# Altium PCB OK1050-C_V1.2.PcbDoc (part 2 of 3)
Units mm, origin at the board's own origin, x right, y up, seen from the top; angles counter-clockwise.
Board outline 103.88 x 80.73 mm, 2 copper layers (Component Side, Bottom Layer), stack 0.325 mm thick; 231 components, 276 nets, 1026 pads, 717 vias.
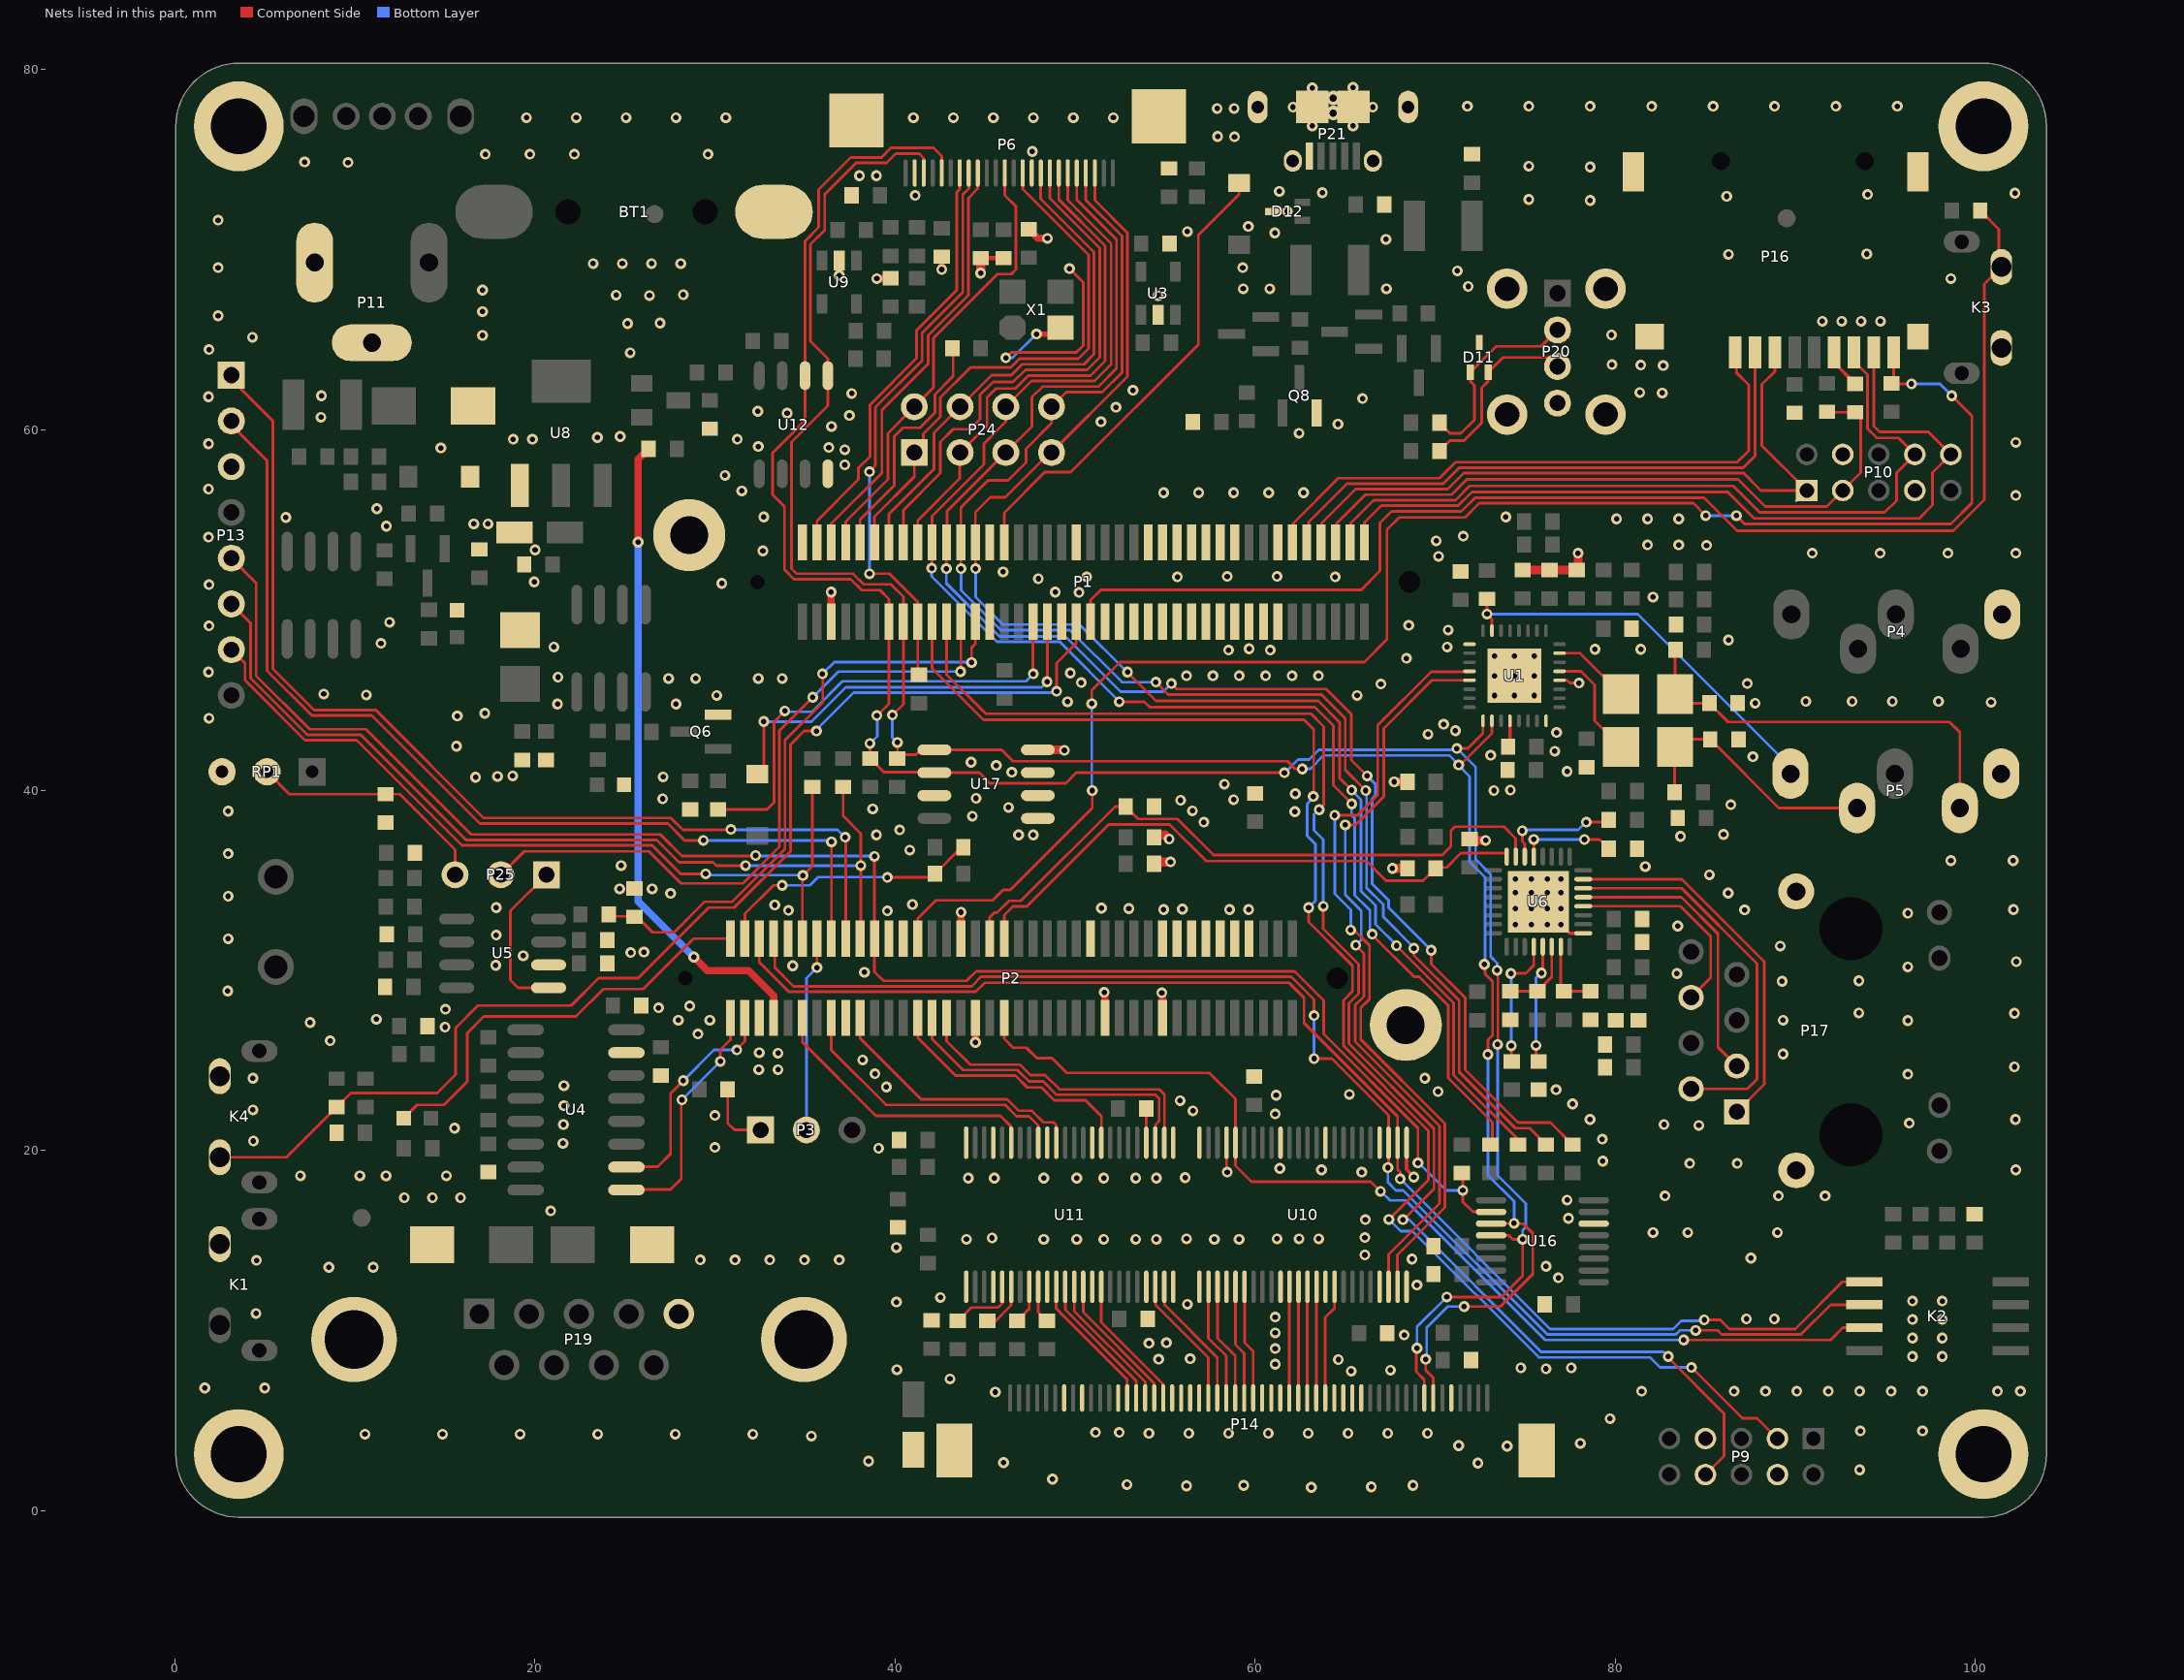
[diagram p2: the nets of this part, all layers, seen from the top]

## Via types
v1: diameter 0.6, hole 0.3, Component Side to Bottom Layer, tented both sides, 667 vias
v2: diameter 0.8, hole 0.4, Component Side to Bottom Layer, tented both sides, 20 vias
v3: diameter 0.66, hole 0.3, Component Side to Bottom Layer, tented both sides, 16 vias
v4: diameter 0.5, hole 0.3, Component Side to Bottom Layer, tented both sides, 9 vias
v5: diameter 1, hole 0.4, Component Side to Bottom Layer, tented both sides, 5 vias

## Nets (pads, with @x,y where several pads share a name; then routed paths per layer and width w, separated by ;. In a path a pad name is that pad's centre, name@x,y a point inside that pad or via, vN(x,y) a via of type N, cw(c..) or ccw(c..) an arc to the next point about the centre after c; other vN are vias at no path point) (continued)
D9_LCDIF_DATA06/BT_CFG_6: K2.3 P2.42 U10.20 | length 58.3
  Component Side w0.152: P2.42@46.061,27.361 46.061,26.202 46.558,25.705 47.295,25.705 47.881,25.118 48.72,25.118 49.534,24.304 57.459,24.304 58.896,22.866 U10.20@58.896,20.371 ; U10.20@58.905,20.429 58.905,19.149 59.792,18.263 66.421,18.263 v1(66.954,17.729) ; v1(83.795,9.474) 91.948,9.474 92.634,10.16 K2.3@93.828,10.16
  Bottom Layer w0.152: v1@67.005,17.704 67.488,17.221 68.351,17.221 76.098,9.474 v1(83.795,9.474)
D10_LCDIF_DATA09: P2.50 U11.2 | length 17.3
  Component Side w0.152: P2.50@42.861,27.361 42.861,26.074 44.171,24.765 46.935,24.765 47.52,24.181 48.336,24.181 49.125,23.392 54.662,23.392 54.966,23.089 U11.2@54.966,20.396
D11_LCDIF_DATA15: P2.62 U11.14 | length 15
  Component Side w0.152: P2.62@38.061,27.361 38.061,26.226 41.453,22.835 46.23,22.835 46.865,22.2 47.6,22.2 48.242,21.557 48.801,21.557 48.946,21.412 U11.14@48.946,20.422
D12_ENET_RX_D1: P2.43 R55.2 U6.15 | length 36.5
  Component Side w0.152: P2.43@45.261,31.761 45.261,32.942 45.517,33.198 45.669,33.198 46.33,33.858 46.99,33.858 52.222,39.091 R55.2@52.807,39.091 53.493,38.404 55.678,38.404 57.683,36.398 70.385,36.398 70.866,36.879 70.866,37.744 71.095,37.973 73.812,37.973 74.467,37.318 U6.15@74.467,36.307
D13_SD1_CD: P2.53 P16.11 R22.1 | length 89.2
  Component Side w0.152: P2.53@41.261,31.761 41.261,32.879 42.266,33.884 45.415,33.884 45.999,34.468 46.406,34.468 50.952,39.014 v1(50.952,39.98) ; v1(50.927,44.806) 50.927,45.542 52.502,47.117 66.065,47.117 67.31,48.362 67.31,54.458 67.996,55.143 71.653,55.143 72.441,55.931 84.328,55.931 v1(85.014,55.245) ; v1(86.716,55.245) 87.173,54.788 98.628,54.788 99.797,55.956 99.797,60.782 v1(98.679,61.9) ; R22.1@95.123,62.586 R22.1@95.326,62.586 95.352,62.56 v1(96.444,62.56) ; R22.1@95.45,62.913 P16.11@95.45,64.309
  Bottom Layer w0.152: v1(50.927,44.806) 50.927,40.005 v1(50.952,39.98) ; v1(85.014,55.245) v1(86.716,55.245) ; v1(96.444,62.56) 98.019,62.56 v1(98.679,61.9)
D14_WDOG1_B: P2.55
D_N: D11.1 P20.2 R93.1 | length 11
  Component Side w0.152: R93.1@70.231,60.401 70.815,59.817 71.425,59.817 72.166,60.558 72.166,62.022 72.166,62.482 71.941,62.707 D11.1@71.941,63.208 73.381,64.648 75.875,64.648 P20.2@76.784,65.557
D_P: D11.2 P20.3 R94.1 | length 10.4
  Component Side w0.152: R94.1@70.231,58.826 70.815,59.411 71.593,59.411 72.572,60.39 72.572,61.854 72.572,62.339 72.941,62.707 D11.2@72.941,63.208 73.762,64.029 76.28,64.029 P20.3@76.784,63.525
E1_SEMC_CS0: P2.19
E3_SEMC_D0: P1.20
E4_SEMC_D15: P1.16
E5_SEMC_D13: P1.14
E7_LCDIF_ENABLE: P2.70 U11.19 | length 15.8
  Component Side w0.152: P2.70@34.861,27.361 34.861,25.997 38.936,21.923 45.852,21.923 46.431,21.344 U11.19@46.431,20.422
E8_LCDIF_HSYNC: P2.66 U11.16 | length 16
  Component Side w0.152: P2.66@36.461,27.361 36.461,25.566 39.496,22.531 46.104,22.531 46.739,21.896 47.445,21.896 47.955,21.385 U11.16@47.955,20.422
E10_LCDIF_DATA10: P2.52 U11.3 | length 17.7
  Component Side w0.152: P2.52@42.061,27.361 42.061,26.189 43.79,24.46 46.81,24.46 47.445,23.825 48.235,23.825 48.972,23.088 54.458,23.088 54.661,22.885 54.661,21.615 54.458,21.412 U11.3@54.458,20.396
E11_LCDIF_DATA11: P2.54 U11.9 | length 14.6
  Component Side w0.152: P2.54@41.261,27.361 41.261,26.252 43.358,24.155 46.685,24.155 47.346,23.495 48.133,23.495 48.844,22.784 50.571,22.784 51.46,21.895 U11.9@51.46,20.422
E12_ENET_RX_D0: P2.41 R74.1 U6.16 | length 33.2
  Component Side w0.152: P2.41@46.061,31.761 46.061,33.056 46.558,33.553 47.32,33.553 51.867,38.1 55.245,38.1 57.277,36.068 66.167,36.068 67.259,34.976 69.317,34.976 70.053,35.712 70.637,35.712 71.425,36.5 U6.16@73.939,36.5
E14_JTAG_TMS/SWD_DIO: P2.63 P13.1 | length 58.4
  Component Side w0.152: P13.1@3.073,62.89 5.461,60.503 5.461,46.734 7.745,44.45 11.176,44.45 17.171,38.455 27.56,38.455 28.219,37.795 v1@30.886,37.795 ; v1(37.236,37.389) 37.261,37.364 P2.63@37.261,31.761
  Bottom Layer w0.152: v1@30.886,37.795 36.805,37.795 v1@37.211,37.389
  other v1: 30.886,37.821
ENET_CONFIG0: R63.2 U6.28 | length 7.4
  Component Side w0.152: v1(74.219,25.806) R63.2@74.244,24.943 ; v1@74.244,29.896 74.441,29.896 74.499,29.838 75.025,29.838 75.467,30.281 U6.28@75.467,31.307
  Bottom Layer w0.152: v1@74.219,29.794 v1(74.219,25.806) v1@74.244,25.908
  other v1: 74.193,29.82
ENET_CONFIG1: R76.2 U6.29 | length 6.7
  Component Side w0.152: v1@75.59,26.06 v1(75.59,25.832) 75.59,25.095 R76.2@75.743,24.943 ; v1@75.895,29.896 75.967,29.968 U6.29@75.967,31.307
  Bottom Layer w0.152: v1(75.59,25.832) 75.59,29.591 v1@75.844,29.845
  other v1: 75.895,29.845
ENET_PHYAD0: R69.1 U6.13 | length 5.3
  Component Side w0.152: U6.13@75.467,36.307 v1(75.467,37.266) ; v1(78.283,37.262) 79.121,37.262 R69.1@79.629,36.754
  Bottom Layer w0.152: v1(75.467,37.266) v1@78.283,37.266
ENET_PHYAD1: R6.2 U6.14 | length 6.6
  Component Side w0.152: v1(74.828,37.744) 74.828,37.16 74.967,37.021 U6.14@74.967,36.307 ; v1(78.384,38.227) 79.578,38.227 R6.2@79.629,38.278
  Bottom Layer w0.152: v1(74.828,37.744) 74.878,37.794 77.926,37.794 78.384,38.252 v1(78.384,38.227)
ETH1_RX_N: P17.6 U6.4 | length 11.6
  Component Side w0.152: U6.4@78.217,33.557 83.613,33.557 85.293,31.877 85.293,29.584 P17.6@84.203,28.494
ETH1_RX_P: P17.3 U6.5 | length 16.1
  Component Side w0.152: U6.5@78.217,34.057 83.672,34.057 85.7,32.029 85.7,25.728 P17.3@86.743,24.684
ETH1_TX_N: P17.2 U6.6 | length 21.7
  Component Side w0.152: U6.6@78.217,34.557 83.68,34.557 87.859,30.378 87.859,23.953 87.321,23.414 P17.2@84.203,23.414
ETH1_TX_P: P17.1 U6.7 | length 20.9
  Component Side w0.152: U6.7@78.181,35.052 83.693,35.052 88.265,30.48 88.265,23.666 P17.1@86.743,22.144
F1_SEMC_BA1: P2.17
F2_SEMC_D4: P1.24
F3_SEMC_D1: P1.26
F4_SEMC_D2: P1.22
F11_BOOT_MODE0: K2.2 P2.73 U10.3 | length 76
  Component Side w0.152: P2.73@33.261,31.761 33.325,31.697 33.325,30.15 34.359,29.115 44.254,29.115 44.78,29.642 62.001,29.642 63.271,28.372 v1(63.271,27.483) ; v1(63.271,25.095) 64.264,25.095 67.405,21.954 U10.3@67.405,20.429 v1@67.405,19.04 ; v1(84.455,10.008) 85.674,10.008 85.904,9.778 90.296,9.778 91.948,11.43 K2.2@93.828,11.43
  Bottom Layer w0.152: v1@63.271,25.146 v1(63.271,27.483) ; v1(67.371,19.04) 67.371,18.227 67.818,17.78 68.223,17.78 76.224,9.779 83.353,9.779 83.581,10.008 v1(84.455,10.008)
F11_SAI1_TX_SYNC: U1.13 U10.46 | length 42.1
  Component Side w0.152: v1(64.999,38.075) 65.566,38.075 67.132,39.641 67.132,43.434 69.803,46.105 U1.13@71.897,46.105 ; v1(65.583,31.394) 66.04,30.937 66.04,28.55 65.557,28.067 65.557,26.035 70.232,21.361 70.232,17.044 67.405,14.218 U10.46@67.405,12.429
  Bottom Layer w0.152: v1(64.999,38.075) 64.999,34.188 65.888,33.299 65.888,31.699 v1(65.583,31.394)
F12_JTAG_TCKS/WD_CLK: P2.65 P13.2 | length 55.3
  Component Side w0.152: P13.2@3.073,60.35 5.131,58.293 5.131,46.634 7.62,44.145 10.947,44.145 16.942,38.151 27.381,38.151 28.321,37.211 v1(29.362,37.211) ; P2.65@36.461,31.761 36.474,31.774 v1(36.474,37.135)
  Bottom Layer w0.152: v1(29.362,37.211) 36.449,37.211 36.474,37.186 v1(36.474,37.135)
F13_SAL1_RXD: P2.67 P3.2 | length 10.9
  Component Side w0.152: v1(35.661,30.15) P2.67@35.661,31.761
  Bottom Layer w0.152: P3.2@35.077,21.133 35.077,29.566 v1(35.661,30.15)
F14_SAL1_TXD: P2.61 P13.6 R35.2 | length 51.6
  Component Side w0.152: P13.6@3.15,50.343 4.218,49.274 4.218,46.226 7.365,43.079 10.337,43.079 16.181,37.236 26.772,37.236 28.016,35.992 29.896,35.992 30.074,35.814 v1(31.699,35.814) ; R35.2@37.114,40.183 37.114,38.578 38.1,37.592 v1(38.1,35.814) 38.1,31.851 38.125,31.825 P2.61@38.061,31.761
  Bottom Layer w0.152: v1(31.699,35.814) v1(38.1,35.814)
G1_SEMC_A1: P2.9
G2_SEMC_A10: P2.11
G3_SEMC_A2: P2.7
G4_SEMC_D3: P1.28
G5_SEMC_D5: P1.30
G10_JTAG_NTRST: P2.59 P13.5 R41.1 U16.10 | length 95.8
  Component Side w0.152: P13.5@3.15,52.883 4.522,51.51 4.522,46.354 7.493,43.383 10.617,43.383 16.459,37.541 26.975,37.541 28.169,36.347 v1@32.258,36.347 ; v1(38.861,36.322) P2.59@38.861,31.761 38.861,29.922 39.364,29.419 43.974,29.419 44.501,29.947 62.179,29.947 63.805,28.321 63.805,26.467 69.037,21.234 v1(69.037,19.304) ; R41.1@71.526,18.72 v1(71.526,17.78) 71.526,17.145 72.086,16.586 U16.10@73.096,16.586 U16.10@73.325,16.586
  Bottom Layer w0.152: v1@32.258,36.347 v1@38.76,36.347 ; v1@69.088,19.253 69.113,19.279 70.612,17.78 v1(71.526,17.78)
  other v1: 32.258,36.373
G11_ENET_NRST: P2.77 R2.2 R59.2 | length 15.7
  Component Side w0.152: P2.77@31.661,31.761 31.661,33.134 33.249,34.722 v1(33.731,34.722) ; v1(39.573,35.154) 41.961,35.154 R2.2@42.215,35.408 ; R2.2@42.215,35.357 43.688,36.83 R59.2@43.79,36.83 ; R59.2@43.688,36.551 R59.2@43.79,36.551
  Bottom Layer w0.152: v1(33.731,34.722) 35.281,34.722 35.738,35.179 39.827,35.179 39.802,35.154 v1(39.573,35.154)
G12_CSI_D3/ROW0: P1.57 P6.21 P24.8 R107.1 | length 82.6
  Component Side w0.152: v1@43.661,52.3 43.661,55.701 45.161,57.201 46.279,57.201 47.269,58.191 47.269,58.953 48.692,60.376 P24.8@48.692,61.29 49.505,62.103 51.511,62.103 52.604,63.196 52.604,70.764 50.593,72.774 P6.21@50.593,74.269 ; v1(54.483,45.999) 55.169,45.314 63.678,45.314 64.999,43.993 64.999,41.123 v1(66.142,39.98) ; v1(68.809,31.217) 68.809,30.834 71.323,28.319 71.323,24.359 74.447,21.234 75.235,21.234 R107.1@76.149,20.32
  Bottom Layer w0.152: v1(43.663,52.299) 43.663,51.101 45.869,48.895 49.708,48.895 52.603,45.999 v1(54.483,45.999) ; v1(66.142,39.98) 66.186,39.935 66.186,34.576 67.107,33.655 67.107,32.969 v1@68.834,31.242
G13_SAL1_MCLK: P2.69 P13.7 R36.2 | length 46.2
  Component Side w0.152: P13.7@3.15,47.803 3.912,47.041 3.912,46.101 7.237,42.775 10.108,42.775 15.951,36.932 26.518,36.932 28.105,35.344 v1@29.477,35.344 ; P2.69@34.861,31.761 34.861,35.235 v1(34.887,35.261) 35.408,35.782 R36.2@35.408,40.183 R36.2@35.611,40.183
  Bottom Layer w0.152: v1(29.489,35.357) 29.56,35.286 v1@34.778,35.286
G14_BOOT_MODE1: K2.1 P2.75 U10.2 | length 75.7
  Component Side w0.152: P2.75@32.461,31.761 32.461,30.455 34.104,28.811 44.483,28.811 44.983,29.312 61.874,29.312 62.713,28.473 62.713,27.076 67.905,21.884 U10.2@67.905,20.429 67.905,18.937 68.047,18.796 v1(68.047,18.415) ; v1(84.938,10.592) 85.827,10.592 86.336,10.082 89.991,10.082 92.608,12.7 K2.1@93.828,12.7
  Bottom Layer w0.152: v1(68.047,18.415) 76.378,10.084 83.21,10.084 83.663,10.536 v1@84.882,10.536
G14_SAL1_TX_BCLK: U1.12 U10.47 | length 43.4
  Component Side w0.152: v1@64.313,38.608 v1(64.414,38.608) 65.669,38.608 66.802,39.741 66.802,43.612 69.769,46.579 U1.12@71.897,46.579 ; v1(65.303,32.233) 65.491,32.233 66.345,31.379 66.345,28.397 65.862,27.915 65.862,26.162 70.536,21.488 70.536,16.84 67.894,14.199 U10.47@67.894,12.471
  Bottom Layer w0.152: v1(64.414,38.608) 64.414,34.239 65.303,33.35 v1(65.303,32.233)
GND: BT1.2 C1.1 C2.1 C3.1 C4.1 C5.1 C11.1 C12.1 C16.2 C17.2 C18.2 C19.2 C20.2 C21.2 C22.1 C24.1 C25.1 C26.1 C28.1 C29.1 C30.2 C31.2 C32.2 C33.2 C34.2 C35.2 C36.1 C37.1 C38.2 C39.2 C40.2 C41.2 C42.2 C43.2 C44.2 C45.1 C47.1 C48.1 C49.2 C52.1 C56.2 C57.2 C59.2 C60.1 C61.1 C62.2 C64.1 C65.1 C66.1 C67.1 C68.1 D1.2 D2.2 D9.1 D10.1 D11.3 D12.3 K1.1 K3.1 K4.1 LED3.2 LED4.2 M1.1 M2.1 M3.1 M4.1 M5.1 M6.1 P1.13 P1.18 P1.27 P1.38 P1.41 P1.53 P1.54 P1.76 P1.79 P2.15 P2.20 P2.28 P2.29 P2.46 P2.47 P2.57 P2.64 P2.71 P2.76 P4.1 P5.1 P6.2 P6.15 P6.25 P6.26 P9.4 P9.7 P10.4 P10.7 P11.2 P11.3 P13.3 P14.5 P14.15 P14.16 P14.17 P14.18 P14.24 P14.25 P14.26 P14.33 P14.34 P14.35 P14.36 P14.42 P14.46 P14.48 P14.55 P14.56 P16.3 P16.6 P16.12 P16.13 P17.13 P17.14 P19.5 P19.10 P19.11 P20.4 P20.5 P20.6 P20.7 P20.8 P21.5 P21.6 P21.7 P21.8 P21.9 P21.10 Q6.2 Q8.2 R4.2 R7.2 R8.2 R13.2 R15.2 R17.1 R20.2 R24.2 R27.1 R34.1 R37.1 R38.1 R46.1 R52.2 R55.1 R60.1 R61.1 R64.2 R69.2 R72.1 R74.2 R76.1 R89.1 R90.1 R96.1 RP1.3 U1.9 U1.20 U1.24 U1.28 U1.33 U3.2 U4.15 U5.2 U6.1 U6.33 U8.3 U9.2 U10.1 U10.4 U10.10 U10.15 U10.21 U10.24 U10.25 U10.28 U10.34 U10.39 U10.45 U10.48 U11.1 U11.4 U11.10 U11.15 U11.21 U11.24 U11.25 U11.28 U11.34 U11.39 U11.45 U11.48 U12.4 U16.6 U17.1 U17.2 U17.3 U17.4 U17.7 X1.2 | length 49.1
  Component Side w0.152: v1(46.152,64.008) 46.457,64.313 50.063,64.313 50.446,64.695 50.446,68.197 v1(49.682,68.961) ; U11.4@53.95,20.431 C67.1@53.95,22.327 ; U10.21@58.405,20.429 58.405,18.912 v1@58.522,18.796 ; D12.3@60.973,72.136 v1@61.772,72.136 ; U1.28@76.897,46.105 77.314,46.105 77.47,45.949 v1(77.978,45.949)
  Component Side w0.2: v1(43.663,33.223) v1@43.663,33.376 ; U10.1@68.405,20.429 68.405,18.951 v1@68.824,18.532 ; C1.1@74.147,42.524 U1.20@74.147,43.855 ; U6.33@75.717,33.807 v3(76.987,32.537) 77.465,32.059 78.217,32.059 U6.1@78.217,32.057 ; P16.6@92.15,64.309 92.15,63.729 C39.2@93.319,62.56
  Component Side w0.254: C20.2@44.755,69.545 C21.2@46.025,69.545
  Component Side w0.3: v1(47.854,65.329) X1.2@48.655,65.329
  Component Side w0.4: v1(36.449,51.003) 36.449,49.373 P1.76@36.461,49.361 ; v1@36.906,68.656 U9.2@36.906,69.399 ; v1(38.989,68.402) 39.726,68.402 C11.1@39.751,68.428 ; C18.2@42.596,69.621 42.596,68.936 v1@42.621,68.91 ; P2.47@43.661,31.761 43.661,33.222 v1(43.663,33.223) ; v1(44.461,25.998) P2.46@44.461,27.361 ; C68.1@47.422,71.145 47.93,70.637 v1(48.463,70.637) ; P2.28@51.661,27.361 v1@51.661,28.73 ; P2.20@54.861,27.361 v1@54.861,28.705
  Component Side w0.5: v1(44.755,68.707) C20.2@44.755,69.545 ; U17.4@47.93,42.242 v1@49.43,42.242 ; R72.1@54.381,36.017 v1(55.296,36.017) ; R34.1@54.407,37.516 54.991,37.516 v1(55.22,37.287) ; v1(67.615,35.662) R74.2@68.453,35.662 ; v1(67.716,40.462) R64.2@68.453,40.462 ; C40.2@71.984,37.211 v1(72.796,37.211) ; R8.2@74.854,52.222 R4.2@77.851,52.222 ; R4.2@77.927,52.299 v1(77.927,53.162)
  Bottom Layer w0.152: v1(46.152,64.008) 46.533,64.008 v1(47.854,65.329)
  other v1: 63.119,1.295 66.446,1.321 56.185,1.372 59.36,1.397 68.758,1.397 52.883,1.448 48.743,1.753 93.565,2.261 72.365,2.642 46.025,2.667 38.532,2.743 73.99,3.581 71.298,3.607 78.054,3.734 35.357,4.14 10.566,4.242 14.874,4.242 19.182,4.242 23.49,4.242 27.798,4.242 32.106,4.242 54.102,4.293 56.312,4.293 58.522,4.293 60.731,4.293 62.941,4.293 65.151,4.293 67.361,4.293 69.571,4.293 51.13,4.343 52.451,4.343 93.599,4.42 97.053,4.42 79.705,5.105 45.568,6.579 81.458,6.629 86.589,6.629 88.333,6.629 90.077,6.629 91.821,6.629 93.565,6.629 95.309,6.629 97.053,6.629 101.219,6.629 102.489,6.629 1.676,6.807 5.004,6.807 43.053,7.315 65.329,7.747 67.513,7.798 40.107,7.823 76.149,7.874 74.752,7.925 77.546,7.925 61.112,8.128 64.618,8.382 54.635,8.407 56.388,8.433 96.495,8.56 98.146,8.56 61.112,9 54.102,9.296 55.067,9.322 96.495,9.584 98.146,9.584 68.275,9.754 61.112,9.872 96.495,10.609 98.146,10.609 87.274,10.643 88.824,10.643 61.112,10.744 4.521,10.947 56.236,11.455 40.081,11.582 96.495,11.633 98.146,11.633 42.52,11.836 68.986,12.522 76.835,12.929 8.56,13.513 11.024,13.513 76.149,13.564 4.547,13.894 29.185,13.919 31.115,13.919 33.045,13.919 34.976,13.919 36.906,13.919 68.707,13.97 87.528,14.021 66.091,14.199 40.081,14.605 43.967,15.062 48.26,15.062 50.089,15.062 51.587,15.062 53.365,15.062 54.508,15.062 57.734,15.062 59.106,15.062 56.185,15.088 61.214,15.088 62.433,15.088 63.525,15.088 45.39,15.138 66.091,15.164 82.093,15.443 84.023,15.443 89.002,15.443 66.116,16.154 77.394,16.231 20.879,16.637 77.318,17.247 12.751,17.374 14.313,17.374 15.875,17.374 82.753,17.475 89.052,17.475 91.643,17.475 44.069,18.466 45.517,18.466 48.26,18.466 50.089,18.466 51.587,18.466 53.365,18.466 54.508,18.466 56.109,18.491 68.809,18.517 6.985,18.593 10.287,18.593 11.735,18.593 15.088,18.593 58.445,18.796 65.913,18.796 63.678,18.923 102.235,18.923 61.366,18.999 84.125,19.279 86.766,19.279 79.299,19.406 39.091,20.117 29.997,20.168 21.565,20.396 4.369,20.523 79.273,20.625 15.545,21.234 84.633,21.387 21.59,21.438 82.702,21.438 96.317,21.514 78.588,21.717 102.21,21.717 29.997,21.946 61.112,22.022 56.54,22.2 4.343,22.25 21.615,22.479 77.622,22.581 55.829,22.758 61.163,23.063 65.227,23.114 70.155,23.266 76.708,23.368 39.522,23.52 21.615,23.597 4.343,24.003 69.418,24.003 96.241,24.232 38.887,24.257 32.436,24.486 33.503,24.486 102.159,24.638 38.202,25.019 89.306,25.349 33.503,25.4 32.461,25.425 8.636,26.086 29.058,26.467 15.011,26.848 7.518,27.102 27.965,27.229 29.718,27.229 89.306,27.229 96.241,27.212 11.201,27.28 102.159,27.61 93.523,27.635 15.037,27.838 26.873,27.915 28.6,28.016 54.813,28.753 51.613,28.778 2.946,28.854 89.256,29.388 93.523,29.413 83.414,29.82 38.303,29.896 96.241,30.192 34.315,30.251 17.831,30.277 102.26,30.48 19.355,30.81 25.324,30.988 26.06,31.013 89.154,31.344 2.972,31.75 17.856,31.953 83.464,32.461 96.241,33.172 39.573,33.299 34.087,33.325 87.173,33.35 54.915,33.376 58.572,33.376 59.639,33.376 102.108,33.376 55.956,33.401 52.984,33.426 51.46,33.452 17.856,33.477 33.325,33.63 40.97,33.655 2.972,34.112 27.534,34.265 86.258,34.29 24.714,34.519 26.518,34.519 85.217,35.306 81.661,35.763 24.79,35.814 98.628,36.093 102.083,36.093 2.972,36.474 40.818,36.678 83.617,37.44 38.964,37.516 46.863,37.516 47.676,37.516 86.004,37.541 40.259,37.795 57.15,38.227 44.298,38.557 62.205,38.811 2.972,38.837 56.515,38.859 38.76,38.964 46.304,39.04 86.411,39.192 55.855,39.443 58.801,39.472 27.102,39.522 44.501,39.548 62.23,39.802 73.254,39.98 74.168,40.005 58.293,40.335 16.713,40.716 27.127,40.742 17.932,40.767 18.771,40.792 46.482,40.996 77.318,41.046 45.618,41.377 44.221,41.554 87.63,41.859 73.076,41.935 76.632,42.164 49.403,42.215 15.646,42.443 69.596,43.104 76.733,43.205 71.12,43.307 70.46,43.663 1.905,43.993 15.697,44.12 17.221,44.272 21.26,44.78 27.838,44.78 87.757,44.831 100.863,44.882 49.581,44.907 90.576,44.933 93.142,44.933 95.377,44.933 97.942,44.933 30.099,45.263 65.659,45.263 10.643,45.288 8.28,45.339 66.98,45.898 87.325,45.923 50.343,45.974 27.432,46.203 28.931,46.203 32.41,46.203 33.731,46.203 21.285,46.279 56.185,46.355 57.65,46.355 59.114,46.355 60.579,46.355 62.044,46.355 63.508,46.355 49.733,46.507 1.88,46.558 68.402,47.32 58.522,47.777 60.833,47.777 78.867,47.828 81.407,47.828 59.665,47.854 21.057,47.955 70.663,47.955 11.455,48.158 86.284,48.336 70.714,48.895 1.905,49.124 68.529,49.149 11.938,49.327 82.093,50.724 50.216,50.978 48.895,51.003 1.905,51.41 30.378,51.486 19.964,51.562 47.955,51.74 50.648,51.841 55.677,51.841 64.44,51.841 58.445,51.867 61.214,51.867 45.999,52.121 70.18,52.984 90.932,53.162 94.7,53.162 98.467,53.162 102.235,53.162 32.664,53.289 20.015,53.34 85.065,53.594 81.788,53.619 83.515,53.619 70.053,53.848 1.88,54.051 71.552,54.102 11.76,54.661 16.612,54.788 17.399,54.788 80.061,55.067 81.788,55.067 83.515,55.067 6.172,55.143 32.715,55.169 73.914,55.169 11.227,55.626 102.235,56.363 54.915,56.515 56.858,56.515 58.801,56.515 60.744,56.515 62.687,56.515 31.496,56.617 1.88,56.718 30.556,57.48 37.211,58.064 37.211,58.903 14.783,59.004 36.322,59.03 32.41,59.08 1.88,59.233 102.235,59.309 18.796,59.487 19.863,59.487 31.242,59.487 23.47,59.588 24.74,59.639 62.433,59.817 36.474,60.198 64.592,60.325 51.435,60.452 8.128,60.706 37.465,60.808 34.011,60.935 32.385,61.036 52.273,61.265 65.964,61.747 1.88,61.849 8.153,61.9 37.592,62.027 82.601,62.052 81.356,62.078 53.213,62.205 82.652,63.576 81.407,63.602 79.807,63.627 25.298,64.287 1.905,64.465 4.318,65.151 17.094,65.253 79.781,65.278 25.146,65.913 26.949,65.938 91.491,66.04 92.566,66.04 93.641,66.04 94.717,66.04 2.413,66.345 17.094,66.573 26.365,67.462 54.61,67.462 24.511,67.488 28.245,67.513 17.094,67.767 59.334,67.843 60.808,67.843 67.285,67.843 71.831,67.97 98.628,68.402 36.906,68.58 71.222,68.834 42.596,68.91 2.413,69.012 59.309,69.012 23.241,69.24 24.86,69.24 26.479,69.24 28.099,69.24 86.284,69.748 93.955,69.774 67.259,70.587 61.087,70.942 56.236,71.018 59.614,71.298 2.413,71.653 61.776,72.14 78.602,72.746 75.191,72.796 86.182,72.974 41.123,73.025 94.005,73.076 102.184,73.152 63.729,73.177 61.341,73.254 38.024,74.117 38.964,74.117 78.602,74.6 75.191,74.651 9.627,74.854 7.214,74.879 17.247,75.311 19.721,75.311 22.195,75.311 29.616,75.311 47.625,75.463 58.852,76.276 57.912,76.302 63.17,76.886 65.43,76.886 19.533,77.343 22.301,77.343 25.07,77.343 27.838,77.343 30.607,77.343 41.021,77.343 43.241,77.343 45.461,77.343 47.681,77.343 49.901,77.343 52.121,77.343 57.887,77.851 58.826,77.851 62.103,77.927 66.523,77.927 71.78,77.978 75.191,77.978 78.602,77.978 82.013,77.978 85.424,77.978 88.835,77.978 92.246,77.978 95.656,77.978 63.17,78.994 65.43,79.019
  other v2: 64.338,77.597 64.338,78.435
  other v3: 74.447,32.537 75.336,32.537 76.225,32.537 74.447,33.426 75.336,33.426 76.225,33.426 76.987,33.426 74.447,34.315 75.336,34.315 76.225,34.315 76.987,34.315 74.447,35.077 75.336,35.077 76.225,35.077 76.987,35.077
  other v4: 73.297,45.255 74.397,45.255 75.497,45.255 73.297,46.355 74.397,46.355 75.497,46.355 73.297,47.455 74.397,47.455 75.497,47.455
H1_SEMC_A3: P2.13
H2_SD1_D2: P1.11 P16.9 | length 33.9
  Component Side w0.152: P1.11@62.061,53.761 62.128,53.828 62.103,53.854 62.103,54.813 64.618,57.328 70.231,57.328 71.119,58.216 86.766,58.216 87.401,58.852 87.401,62.509 86.716,63.195 86.716,63.989 86.538,64.167 P16.9@86.665,64.294
H3_SEMC_DM0: P1.34
H4_SEMC_D7: P1.32
H5_SEMC_D6: P1.36
H10_USB_OTG1_ID: D5.1 P1.51 | length 26.2
  Component Side w0.152: P1.51@46.061,53.761 46.061,55.408 48.311,57.658 49.759,57.658 56.845,64.745 56.845,70.815 59.106,73.076 D5.1@59.106,73.711
H11_CSI_D4/COL1: P1.55 P6.22 P24.7 R108.1 | length 78.9
  Component Side w0.152: v1@44.461,52.313 44.461,55.434 45.288,56.261 46.126,56.261 P24.7@48.654,58.788 ; P24.7@48.692,58.75 52.908,62.967 52.908,70.942 51.093,72.757 P6.22@51.093,74.269 ; v1@52.896,46.545 54.483,44.958 63.5,44.958 64.694,43.764 64.694,42.748 64.694,40.665 v1(65.354,40.005) ; v1(67.843,31.369) 71.018,28.194 71.018,24.181 R108.1@74.74,20.46
  Bottom Layer w0.152: v1(44.475,52.299) 44.475,50.718 45.994,49.2 50.241,49.2 v1@52.896,46.545 ; v1(65.354,40.005) 65.354,39.99 65.882,39.462 65.882,34.397 66.675,33.604 66.675,32.563 66.706,32.532 66.716,32.532 67.856,31.392 v1@67.856,31.382
  other v1: 52.908,46.558
H12_CSI_D5/ROW1: P1.59 P6.20 P24.5 R109.1 | length 85.5
  Component Side w0.152: v1(42.85,52.299) P1.59@42.85,53.75 ; P1.59@42.861,53.761 42.899,53.799 42.899,55.497 P24.5@46.152,58.75 47.6,60.198 47.6,61.824 48.184,62.408 51.283,62.408 52.3,63.425 52.3,70.585 50.093,72.792 P6.20@50.093,74.269 ; v1(55.347,45.923) 55.651,45.618 63.932,45.618 65.329,44.221 65.329,41.681 v1(66.218,40.792) ; v1(69.774,31.115) 69.774,30.353 71.653,28.473 71.653,24.486 74.6,21.539 76.403,21.539 R109.1@77.622,20.32
  Bottom Layer w0.152: v1(42.85,52.299) 42.85,51.484 45.794,48.539 49.454,48.539 52.527,45.466 54.889,45.466 v1(55.347,45.923) ; v1(66.218,40.792) 66.67,40.341 66.67,39.695 66.497,39.522 66.497,34.798 67.412,33.884 67.412,33.477 v1(69.774,31.115)
H13_CSI_D9/ROW3: P1.73 P6.12 P24.2 | length 25.1
  Component Side w0.152: P1.73@37.261,53.761 37.261,54.914 39.599,57.252 39.599,59.817 P24.2@41.072,61.29 42.139,62.357 42.139,65.1 45.695,68.656 46.457,68.656 46.704,68.904 46.704,72.422 46.093,73.033 P6.12@46.093,74.269
H14_ADC1_03: C29.2 P25.3 RP1.2 | length 13.6
  Component Side w0.152: RP1.2@5.131,41.021 6.375,39.776 C29.2@11.709,39.776 12.497,39.776 15.57,36.703 P25.3@15.57,35.306
H14_CAN2_TX: P25.1 U5.1 | length 9
  Component Side w0.152: P25.1@20.65,35.306 18.644,33.299 18.644,29.464 19.075,29.032 U5.1@20.762,29.032
H14_CAN2_TX/ADC: P1.58 P25.2 | length 38.3
  Component Side w0.152: P25.2@18.11,35.306 19.406,36.601 26.34,36.601 28.112,34.829 31.558,34.829 33.579,36.85 33.579,43.307 v1(35.433,45.161) ; v1@43.661,46.558 P1.58@43.661,49.361
  Bottom Layer w0.152: v1(35.433,45.161) 36.855,46.584 v1(43.637,46.584) 43.688,46.584 v1@43.713,46.558
HL: C6.1 U1.31 | length 4.4
  Component Side w0.152: U1.31@76.897,47.605 78.047,47.605 C6.1@80.313,45.339
HP_JD: P5.4 R11.2 U1.7 | length 22.2
  Component Side w0.152: R11.2@72.873,50.622 v1(72.873,49.784) 73.147,49.51 U1.7@73.147,48.855
  Bottom Layer w0.152: v1(72.873,49.784) 81.239,49.784 P5.4@89.722,41.3
HPOUTL: C6.2 P5.5 R14.1 R15.1 | length 22.6
  Component Side w0.152: C6.2@83.313,45.339 R14.1@83.313,47.779 ; C6.2@83.821,44.831 R15.1@85.217,44.831 86.258,43.79 98.552,43.79 99.122,43.219 P5.5@99.122,39.009
HPOUTR: C7.2 P5.2 R12.1 R13.1 | length 13.8
  Component Side w0.152: R12.1@83.287,39.878 C7.2@83.287,42.366 ; C7.2@83.745,42.824 R13.1@85.268,42.824 ; R13.1@85.369,42.926 85.369,42.723 89.083,39.009 P5.2@93.422,39.009
HR: C7.1 U1.29 | length 6.3
  Component Side w0.152: U1.29@76.897,46.605 78.084,46.605 78.842,45.847 78.842,43.864 C7.1@80.313,42.393
J1_SD1_D0/SPI1_D0: P1.3 P10.8 P16.7 | length 43.3
  Component Side w0.152: P1.3@65.261,53.761 65.303,53.803 65.303,54.839 66.573,56.108 71.119,56.108 71.907,56.896 86.538,56.896 88.011,55.423 94.945,55.423 95.606,56.083 95.606,57.621 P10.8@96.627,58.642 95.706,59.563 94.513,59.563 94.005,60.071 94.005,63.068 P16.7@93.294,63.779
J2_SD1_D3: P1.9 P16.1 | length 33.2
  Component Side w0.152: P1.9@62.861,53.761 62.967,53.866 62.967,54.889 65.099,57.022 70.433,57.022 71.323,57.912 87.097,57.912 87.75,58.565 87.75,64.295 87.757,64.302 P16.1@87.75,64.309
J3_SD1_CLK0/SPI1_CS0: C39.1 P1.5 P10.3 R57.1 | length 37.6
  Component Side w0.152: P1.5@64.461,53.761 64.516,53.816 64.516,54.813 66.115,56.412 70.915,56.412 71.755,57.252 86.817,57.252 88.316,55.753 91.738,55.753 P10.3@92.627,56.642 93.624,57.639 93.624,60.68 C39.1@93.319,60.985 R57.1@91.771,60.985
J4_SD1_CMD/SPI1_SCLK: P1.7 P10.1 P16.2 | length 39.2
  Component Side w0.152: P1.7@63.661,53.761 63.703,53.803 63.703,54.839 65.583,56.718 70.688,56.718 71.577,57.607 87.122,57.607 88.087,56.642 P10.1@90.627,56.642 ; P16.2@88.85,64.309 88.85,63.247 88.138,62.535 88.138,59.131 P10.1@90.475,56.794
  Bottom Layer w0.152: P10.1@90.043,56.058 P10.1@90.627,56.642
J11_I2C1_SCL: P1.68 P6.5 P14.8 R102.1 U1.17 U12.6 U16.12 U17.6 | length 127.4
  Component Side w0.152: R102.1@38.608,41.767 v1(38.608,42.596) ; R102.1@38.617,41.885 38.681,41.821 R102.1@38.617,41.758 39.379,40.996 U17.6@42.342,40.996 ; v1@39.014,44.145 39.661,44.792 39.661,50.61 39.167,51.105 38.151,51.105 37.541,51.714 34.392,51.714 33.858,52.248 33.858,55.753 33.198,56.413 33.198,58.725 35.001,60.528 U12.6@35.001,63.017 35.001,70.485 35.763,71.247 35.763,73.355 37.541,75.133 39.243,75.133 39.776,75.667 42.139,75.667 42.593,75.212 P6.5@42.593,74.269 ; U17.6@42.189,40.972 44.677,40.972 45.263,40.386 49.479,40.386 50.063,40.97 v1(61.62,40.97) ; v1(68.986,9.017) 68.941,8.972 68.941,7.718 69.39,7.269 P14.8@69.39,6.25 ; v1(70.637,11.862) 73.685,11.862 74.854,13.03 v1(74.854,15.062) 74.295,15.062 74.072,15.286 U16.12@73.248,15.286 ; v1(71.196,42.316) 71.806,42.316 72.647,43.157 U1.17@72.647,43.626 ; v1(73.457,25.883) v1@73.481,25.883 ; v1@73.481,25.882 v1@73.481,29.997
  Bottom Layer w0.152: v1(38.608,42.596) 39.014,43.002 v1@39.014,44.145 ; v1@61.722,41.046 62.382,41.707 62.992,41.707 63.525,42.24 71.064,42.24 71.141,42.316 v1(71.196,42.316) 72.244,41.269 72.244,36.157 73.076,35.325 73.076,30.759 73.431,30.404 v1(73.431,29.997) ; v1(68.986,9.017) 68.986,10.211 v1(70.637,11.862) ; v1(73.457,25.883) 73.457,18.618 75.032,17.043 75.032,15.748 74.854,15.57 v1(74.854,15.062)
  other v1: 38.989,44.145
J12_CSI_VSYNC: P1.77 P6.7 | length 23.8
  Component Side w0.152: P1.77@35.661,53.761 35.661,54.94 37.973,57.252 37.973,57.887 38.608,58.522 38.608,61.392 41.199,63.983 41.199,65.532 43.434,67.767 43.434,73.203 43.593,73.362 P6.7@43.593,74.269
J13_CSI_D6/COL2: P1.63 P6.18 P24.3 | length 28.7
  Component Side w0.152: P1.63@41.261,53.761 41.261,54.977 43.586,57.302 P24.3@43.586,58.979 ; P24.3@43.612,58.75 45.11,60.249 45.11,61.798 45.618,62.306 46.685,62.306 47.396,63.017 50.851,63.017 51.664,63.83 51.664,70.231 49.093,72.801 P6.18@49.093,74.269
J14_CSI_D2/COL0: P1.61 P6.19 P24.6 R106.1 | length 82.3
  Component Side w0.152: v1@42.061,52.348 42.061,55.218 44.933,58.09 44.933,59.233 46.152,60.452 P24.6@46.152,61.29 47.574,62.713 51.079,62.713 51.996,63.629 51.996,70.356 49.593,72.758 P6.19@49.593,74.269 ; v1(52.451,44.907) 53.848,44.907 54.153,44.602 63.322,44.602 64.333,43.592 64.333,40.28 65.354,39.258 v1(65.354,39.243) ; v1(66.497,32.004) 66.497,31.966 68.821,29.642 69.113,29.642 70.714,28.042 70.714,24.028 73.171,21.571 R106.1@73.171,20.434
  Bottom Layer w0.152: v1(42.037,52.324) 42.037,51.867 45.669,48.235 49.149,48.235 52.451,44.933 v1(52.451,44.907) ; v1(65.354,39.243) 65.354,38.608 65.527,38.436 65.527,34.168 66.371,33.324 66.371,32.092 66.459,32.004 v1(66.497,32.004)
JTAG_MOD: P3.1 R39.1 | length 3.9
  Component Side w0.152: R39.1@30.709,23.393 30.709,21.514 31.09,21.133 P3.1@32.537,21.133
K1_SD1_D1/SPI1_D1: P1.1 P10.10 P16.8 | length 46.6
  Component Side w0.152: P1.1@66.127,53.696 P1.1@66.061,53.761 66.061,54.86 67.005,55.804 71.272,55.804 72.034,56.566 86.233,56.566 87.706,55.093 96.876,55.093 97.612,55.829 97.612,57.627 P10.10@98.627,58.642 97.376,59.893 94.666,59.893 94.35,60.209 P16.8@94.35,64.309
K7_ON_REQ: P1.48 R88.2 | length 26.1
  Component Side w0.152: R88.2@30.175,38.938 32.893,38.938 33.275,39.32 33.275,43.79 v1(33.884,44.399) ; v1@47.661,46.558 P1.48@47.661,49.361
  Bottom Layer w0.152: v1@33.884,44.348 35.382,44.348 37.084,46.05 47.269,46.05 v1(47.676,46.457)
K10_CSI_HSYNC: P1.75 P6.9 | length 23.9
  Component Side w0.152: P1.75@36.461,53.761 36.461,54.8 39.268,57.607 39.268,61.112 41.834,63.678 41.834,65.253 44.069,67.488 44.069,72.873 44.593,73.397 P6.9@44.593,74.269
K11_I2C1_SDA: P1.66 P6.3 P14.7 R101.1 U1.18 U12.5 U16.11 U17.5 | length 124.9
  Component Side w0.152: v1(39.853,44.171) 40.461,44.779 40.461,50.75 39.776,51.435 38.252,51.435 37.668,52.019 34.544,52.019 34.259,52.304 34.259,59.329 36.271,61.341 U12.5@36.271,63.017 36.271,63.957 35.306,64.922 35.306,70.307 36.093,71.095 36.093,73.076 37.846,74.828 39.522,74.828 40.03,75.336 41.351,75.336 41.605,75.082 P6.3@41.605,74.041 ; v1(40.132,42.647) 40.132,41.873 40.248,41.758 40.461,41.971 41.158,41.971 41.427,42.24 U17.5@42.24,42.24 ; U17.5@42.189,42.242 45.922,42.242 46.558,41.605 61.798,41.605 62.23,41.173 v1@62.586,41.173 ; v1(69.469,8.407) 69.469,7.798 69.89,7.377 P14.7@69.89,6.445 ; v1(71.298,41.402) 71.399,41.402 73.147,43.149 U1.18@73.147,43.626 ; v1(71.603,11.328) 73.609,11.328 75.413,13.132 75.413,15.392 74.869,15.936 U16.11@73.096,15.936 U16.11@72.431,15.936 ; v1@72.771,30.328 72.771,29.794 73.177,29.388 73.177,26.391 72.923,26.137 v1(72.923,25.324)
  Bottom Layer w0.152: v1(39.853,44.171) 39.853,42.926 v1(40.132,42.647) ; v1@62.636,41.199 63.068,41.199 63.805,41.935 70.764,41.935 v1(71.298,41.402) 71.298,41.371 71.907,40.762 71.907,36.017 72.771,35.154 v1@72.771,30.328 ; v1(69.469,8.407) 69.52,8.458 69.52,10.16 70.688,11.328 v1(71.603,11.328) ; v1(72.923,25.324) 72.923,18.618 74.371,17.17 v1(74.371,15.951)
  other v1: 72.72,30.328 62.611,41.173
K12_CSI_MCLK: P1.71 R62.2 | length 13.4
  Component Side w0.152: P1.71@38.061,53.761 38.061,55.028 39.954,56.921 39.954,59.639 40.437,60.122 41.377,60.122 42.215,60.96 42.215,61.976 43.231,62.992 R62.2@43.231,64.491
K14_UART1_TXD: P2.78 U4.10 | length 12.9
  Component Side w0.152: U4.10@25.083,19.102 26.823,19.102 27.534,19.812 27.534,23.165 v1(28.245,23.876) ; v1(31.217,25.578) 31.166,25.578 31.661,26.073 P2.78@31.661,27.361 P2.78@31.623,27.323
  Bottom Layer w0.152: v1(28.245,23.876) 29.947,25.578 v1(31.217,25.578)
L3_FLEXSPI__A_SS0: P1.29
L4_FLEXSPI_A_CLK: P1.31
L5_FLEXSPI_D3_B: P1.23
L6_WAKEUP: K3.2 P1.40 R29.1 | length 72.9
  Component Side w0.152: P1.40@50.861,49.361 50.861,50.556 51.435,51.13 65.888,51.13 66.929,52.172 66.929,54.839 67.564,55.474 71.45,55.474 72.212,56.236 84.938,56.236 86.766,54.407 98.755,54.407 100.482,56.134 100.482,68.104 K3.2@101.43,69.052 ; R29.1@100.254,72.187 101.295,71.145 K3.2@101.295,69.187
L7_PERI_PWREN: P1.44
L10_CAN2_RX: P1.56 R48.1 R52.1 | length 33.7
  Component Side w0.152: R48.1@24.155,32.995 25.654,32.995 26.543,32.106 27.737,32.106 29.439,33.807 30.966,33.807 33.885,36.726 33.885,42.775 35.992,44.882 v1@35.992,46.457 ; v1(44.247,47.092) 44.247,47.904 44.461,48.119 P1.56@44.461,49.361
  Bottom Layer w0.152: v1(35.972,46.457) 36.632,47.117 v1@44.425,47.117
L11_UART2_TXD: P1.62 P9.3 | length 83.6
  Component Side w0.152: P1.62@42.061,49.361 42.061,46.763 44.907,43.917 62.713,43.917 63.246,43.383 v1@63.246,39.573 ; v1(62.967,33.477) 62.967,32.69 65.405,30.251 65.405,28.829 64.898,28.322 64.898,25.807 69.615,21.09 69.615,18.358 v1(67.424,16.167) ; v1(84.226,7.95) 87.046,5.131 87.869,5.131 P9.3@89,4
  Bottom Layer w0.152: v1(62.967,33.477) 63.348,33.858 63.348,37.008 62.89,37.465 62.89,39.243 v1@63.246,39.599 ; v1(67.424,16.167) 67.44,16.167 68.087,15.519 68.732,15.519 75.743,8.509 81.915,8.509 82.474,7.95 v1(84.226,7.95)
  other v1: 63.221,39.649
L12_CSI_PIXCLK: P1.65 P6.17 | length 29.4
  Component Side w0.152: P1.65@40.461,53.761 40.461,55.549 42.52,57.607 42.52,59.334 43.231,60.046 44.171,60.046 44.729,60.604 44.729,61.951 45.441,62.662 46.558,62.662 47.244,63.348 50.673,63.348 51.36,64.034 51.36,70.103 48.593,72.869 P6.17@48.593,74.269
L13_CSI_D7/ROW2: P1.67 P6.16 P24.4 | length 29.1
  Component Side w0.152: P1.67@39.661,53.761 39.661,55.333 42.164,57.836 42.164,59.842 P24.4@43.612,61.29 45.364,63.043 46.457,63.043 47.066,63.652 50.495,63.652 51.054,64.211 51.054,69.875 48.093,72.836 P6.16@48.093,74.269
L14_UART1_RXD: P2.80 U4.9 | length 13.5
  Component Side w0.152: U4.9@25.083,17.832 27.534,17.832 28.13,18.428 v1@28.13,22.974 ; v1@30.302,24.994 30.302,25.578 30.861,26.137 P2.80@30.861,27.361
  Bottom Layer w0.152: v1(28.169,22.809) v1(30.302,24.943)
LCD_CLK: R54.1 U11.29 | length 3.8
  Component Side w0.152: R54.1@43.504,10.536 44.245,11.278 45.72,11.278 45.951,11.509 U11.29@45.951,12.429
LCD_DATA00: P14.19 U10.40 | length 6.7
  Component Side w0.152: P14.19@63.89,6.445 63.89,10.728 64.405,11.243 U10.40@64.405,12.886
LCD_DATA01: P14.20 U10.38 | length 6
  Component Side w0.152: P14.20@63.39,6.445 U10.38@63.39,12.471
LCD_DATA02: P14.21 U10.37 | length 6
  Component Side w0.152: P14.21@62.89,6.445 U10.37@62.89,12.446
LCD_DATA03: P14.22 U10.36 | length 6.4
  Component Side w0.152: P14.22@62.405,6.445 U10.36@62.405,12.886
LCD_DATA04: P14.23 U10.35 | length 6
  Component Side w0.152: P14.23@61.89,6.445 U10.35@61.89,12.446
LCD_DATA05: P14.27 U10.30 | length 6.1
  Component Side w0.152: U10.30@59.411,12.395 59.411,9.322 59.89,8.842 P14.27@59.89,6.445
LCD_DATA06: P14.28 U10.29 | length 6.2
  Component Side w0.152: U10.29@58.903,12.446 58.903,9.22 59.39,8.733 P14.28@59.39,6.445
LCD_DATA07: P14.29 U10.27 | length 6.4
  Component Side w0.152: U10.27@57.912,12.421 57.912,9.576 58.89,8.597 P14.29@58.89,6.445
LCD_DATA08: P14.30 U10.26 | length 6.4
  Component Side w0.152: U10.26@57.404,12.421 57.404,9.576 58.39,8.59 P14.30@58.39,6.445
LCD_DATA09: P14.31 U11.47 | length 7.2
  Component Side w0.152: U11.47@54.966,12.421 54.966,11.43 57.89,8.505 P14.31@57.89,6.445
LCD_DATA10: P14.32 U11.46 | length 7.2
  Component Side w0.152: U11.46@54.458,12.421 54.458,11.43 57.39,8.497 P14.32@57.39,6.445
LCD_DATA11: P14.37 U11.40 | length 8.1
  Component Side w0.152: U11.40@51.451,12.886 51.451,10.448 54.89,7.009 P14.37@54.89,6.25
LCD_DATA12: P14.38 U11.38 | length 8.3
  Component Side w0.152: U11.38@50.451,12.886 50.451,11.017 54.39,7.078 P14.38@54.39,6.25
LCD_DATA13: P14.39 U11.37 | length 8.3
  Component Side w0.152: U11.37@49.951,12.886 49.951,11.081 53.89,7.142 P14.39@53.89,6.25
LCD_DATA14: P14.40 U11.36 | length 8.3
  Component Side w0.152: U11.36@49.451,12.886 49.451,11.151 53.39,7.212 P14.40@53.39,6.25
LCD_DATA15: P14.41 U11.35 | length 8.3
  Component Side w0.152: U11.35@48.951,12.886 48.951,11.221 52.89,7.282 P14.41@52.89,6.25
LCD_ENABLE: R105.1 U11.30 | length 2.7
  Component Side w0.152: R105.1@45.129,10.536 R105.1@45.41,10.536 ; R105.1@45.461,10.409 46.451,11.399 U11.30@46.451,12.429
LCD_HSYNC: R103.1 U11.33 | length 2.1
  Component Side w0.152: U11.33@47.951,12.429 47.951,11.016 R103.1@48.431,10.536
LCD_VSYNC: R104.1 U11.32 | length 2.2
  Component Side w0.152: R104.1@46.78,10.536 47.426,11.182 ; 47.451,11.182 U11.32@47.451,12.429
LED0_LINK: R61.2 R77.1 U6.30 | length 4.2
  Component Side w0.152: R61.2@74.168,28.829 R77.1@75.565,28.829 ; R77.1@75.667,28.829 76.467,29.63 U6.30@76.467,31.307
LED1_SPEED: R60.2 R78.1 U6.31 | length 4.1
  Component Side w0.152: R78.1@76.967,28.829 U6.31@76.967,31.307 ; R78.1@77.038,28.829 R78.1@77.14,28.829 R60.2@78.613,28.829
M3_FLEXSPI_D1_B: P1.19
M4_FLEXSPI_D0_B: P1.21
M5_FLEXSPI_D2_B: P1.25
M6_ONOFF: K4.2 P1.42 R9.1 | length 66.5
  Component Side w0.152: K4.2@2.507,19.619 6.208,19.619 R9.1@8.992,22.403 9.779,23.19 14.58,23.19 15.596,24.206 15.596,26.797 16.84,28.042 22.022,28.042 23.546,29.566 25.73,29.566 29.642,33.477 31.066,33.477 34.189,36.6 34.189,42.52 34.95,43.282 v1(35.636,43.282) ; v1(48.971,45.491) 48.971,47.066 50.061,48.156 P1.42@50.061,49.361
  Bottom Layer w0.152: v1@35.598,43.32 37.694,45.416 48.896,45.416 v1(48.971,45.491)
M7_POR_B: D3.1 P1.46 | length 23
  Component Side w0.152: D3.1@32.36,40.894 32.715,41.25 v1(32.715,43.815) ; v1@48.461,46.025 P1.46@48.461,49.361
  Bottom Layer w0.152: v1@32.741,43.81 35.352,43.81 37.262,45.72 48.133,45.72 v1(48.438,46.025)
M9_VDD_SNVS_IN: P2.74 R124.1 | length 36.3
  Component Side w0.4: v1(25.73,53.772) 25.73,58.369 R124.1@26.314,58.953 ; v1(28.829,30.734) 29.591,29.972 31.877,29.972 33.261,28.588 P2.74@33.261,27.361
  Bottom Layer w0.4: v1(25.73,53.772) 25.73,33.833 v1(28.829,30.734)
M11_GPIO_LED/PWM: LED2.2 P2.79 | length 23.8
  Component Side w0.152: LED2.2@12.724,21.793 13.461,22.53 14.961,22.53 16.25,23.819 16.25,26.511 17.17,27.432 22.276,27.432 23.801,28.957 26.01,28.957 28.815,31.761 P2.79@30.861,31.761
M12_UART2_RXD: P1.60 P9.8 | length 82.8
  Component Side w0.152: P1.60@42.861,49.361 42.861,46.42 45.034,44.247 63.094,44.247 63.805,43.536 63.805,39.167 v1(63.551,38.913) ; v1(63.779,33.553) 63.779,32.309 65.735,30.353 65.735,28.702 65.202,28.169 65.202,25.933 69.928,21.207 69.928,17.858 v1@68.212,16.142 ; v1(82.931,8.56) 82.931,8.484 86.03,5.385 86.03,3.03 P9.8@85,2
  Bottom Layer w0.152: v1@63.538,38.925 63.271,38.659 63.271,37.77 63.779,37.262 v1(63.779,33.553) ; v1(68.199,16.154) 68.531,16.154 75.871,8.815 82.676,8.815 v1(82.931,8.56)
M13_CSI_D8/COL3: P1.69 P6.14 P24.1 | length 30.2
  Component Side w0.152: P1.69@38.861,53.761 38.861,55.193 41.072,57.404 P24.1@41.072,58.75 41.58,59.258 41.58,59.792 42.52,60.731 42.52,61.798 44.196,63.475 46.431,63.475 46.914,63.957 50.19,63.957 50.75,64.517 50.75,69.722 47.093,73.379 P6.14@47.093,74.269
M14_CSI_PWDN: P1.64 P6.8 R100.1 | length 31.9
  Component Side w0.152: v1(38.583,52.019) 39.7,52.019 41.261,50.458 41.261,46.406 R100.1@41.261,46.38 ; v1(38.583,57.683) 38.913,58.014 38.913,61.265 41.504,63.856 41.504,65.38 43.764,67.64 43.764,73.076 44.093,73.405 P6.8@44.093,74.269
  Bottom Layer w0.152: v1(38.583,52.019) v1(38.583,57.683)